# Altium PCB STM32f051C6T6_debugger.PcbDoc
Units mm, origin at the board's own origin, x right, y up, seen from the top; angles counter-clockwise.
Board outline 40 x 16 mm, 2 copper layers (Top Layer, Bottom Layer); 25 components, 45 nets, 113 pads, 0 vias.
Unrouted connection lines stored in the file: 63.
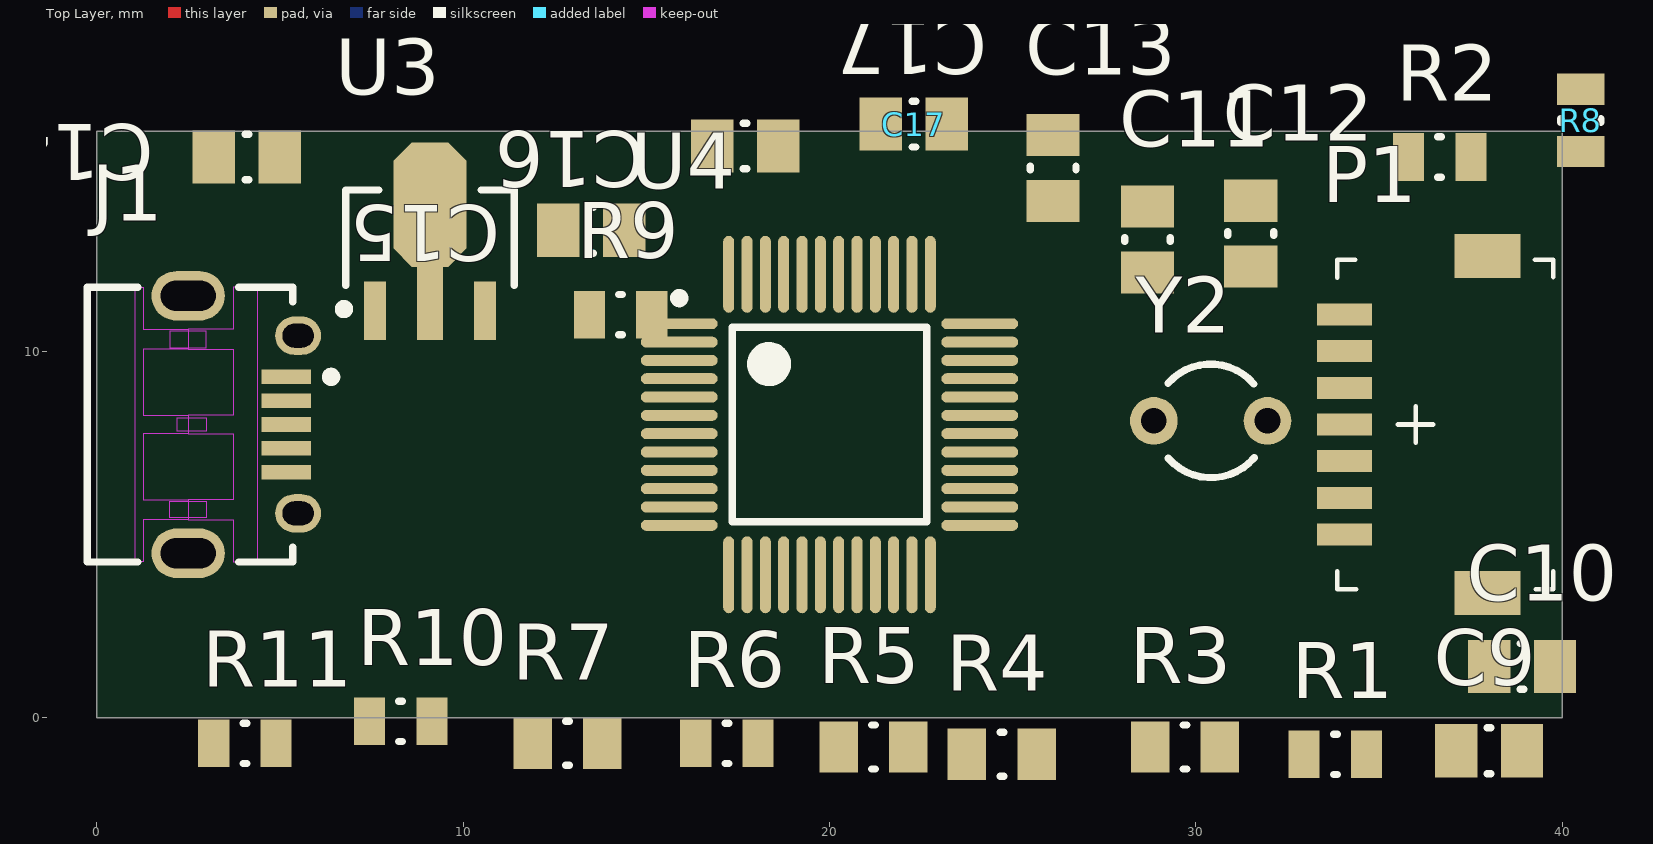
[diagram p0: Top Layer view]
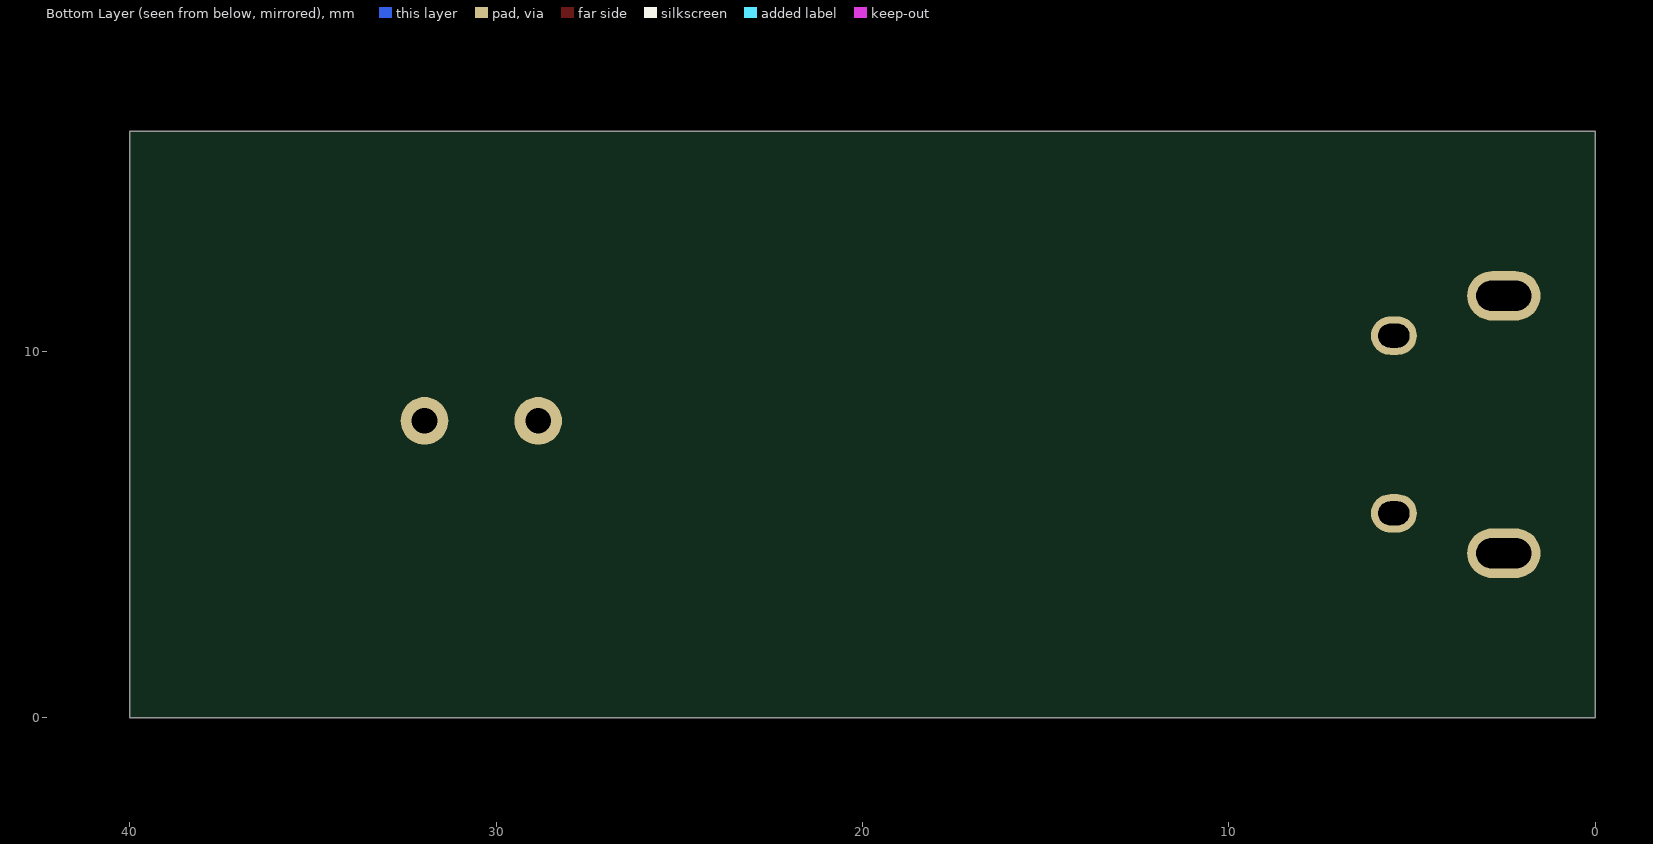
[diagram p1: Bottom Layer view, seen from below]

## Layer stack, top to bottom
Top Solder: solder mask 0.0102, Solder Resist, Dk 3.5
Top Layer: signal copper 0.0356
Dielectric 1: dielectric 0.32, FR-4, Dk 4.8
Bottom Layer: signal copper 0.0356
Bottom Solder: solder mask 0.0102, Solder Resist, Dk 3.5

## Board outline
0,0 40,0 40,16 0,16

## Design rules (kind name [scope] priority, off if disabled: settings)
Clearance [All] p1: gap=0.1 ignorepadtopadclearanceinfootprint=FALSE
MinimumSolderMaskSliver [All] p1: minsoldermaskwidth=0.05
PolygonConnect [All] p1: connectstyle=Relief reliefconductorwidth=0.254 reliefentries=4 polygonreliefangle="90 Angle" airgapwidth=0.254
RoomDefinition STM32f051C6T6_debugger [InComponentClass('STM32f051C6T6_debugger')] p1: confinementstyle=ConfineIn formatcopy=TRUE lockcomponents=FALSE outline -2,-2.2 42,-2.2 42,18 -2,18
RoutingVias [All] p1: holewidth=0.711 width=1.27 viastyle="Through Hole" minholewidth=0.711 minwidth=1.27 maxholewidth=0.711 maxwidth=1.27
SilkToSolderMaskClearance [IsPad] p1: minsilkscreentomaskgap=0.1 clearancetoexposedcopper=TRUE
SolderMaskExpansion [All] p1: expansion=0.102
Width [All] p1: maxlimit=0.254 minlimit=0.254 preferedwidth=0.254
28 further rules are at their usual default settings.

## Components (designator, comment, footprint, x,y, rotation, side; value= is the part's Value field where it differs from the comment)
C9 "CAP 100pF 50V 0805(2012)" CAPC0805(2012)145_N 38,-0.9 r0 top value=100pF
C10 "CAP 100pF 50V 0805(2012)" CAPC0805(2012)145_N 38.9,1.4 r0 top value=100pF
C11 "CAP 100pF 50V 0805(2012)" CAPC0805(2012)145_N 28.677,13.045 r90 top value=100pF
C12 "CAP 100pF 50V 0805(2012)" CAPC0805(2012)145_N 31.496,13.208 r90 top value=100pF
C13 "CAP 100pF 50V 0805(2012)" CAPC0805(2012)145_N 26.1,15 r90 top value=100pF
C14 "CAP 100pF 50V 0805(2012)" CAPC0805(2012)145_N 4.1,15.3 r180 top value=100pF
C15 "CAP 100pF 50V 0805(2012)" CAPC0805(2012)145_N 13.5,13.3 r180 top value=100pF
C16 "CAP 100pF 50V 0805(2012)" CAPC0805(2012)145_N 17.7,15.6 r180 top value=100pF
C17 "CAP 100pF 50V 0805(2012)" CAPC0805(2012)145_N 22.3,16.2 r180 top value=100pF
J1 "ZX62D-B-5P8" HIRO-ZX62D-B-5P8_V 4,8 r270 top
P1 "pico-clasp-7pins" "7 pins pico-clasp" 36,8 r90 top
R1 "1K 5% 0805(2012)" RESC0805(2012)_L 33.8,-1 r0 top value="10000.00 Ohm"
R2 "1K5 5% 0805(2012)" RESC0805(2012)_L 36.65,15.3 r0 top value="1500.00 Ohm"
R3 "Jumper 0805(2012)" RESC0805(2012)_N 29.7,-0.8 r0 top value="0.00 Ohm"
R4 "Jumper 0805(2012)" RESC0805(2012)_N 24.7,-1 r0 top value="0.00 Ohm"
R5 "4K7 5% 0805(2012)" RESC0805(2012)_N 21.2,-0.8 r0 top value="4700.00 Ohm"
R6 "100K 5% 0805(2012)" RESC0805(2012)_L 17.2,-0.7 r0 top value="100000.00 Ohm"
R7 "4K7 5% 0805(2012)" RESC0805(2012)_N 12.85,-0.7 r0 top value="4700.00 Ohm"
R8 "1K 5% 0805(2012)" RESC0805(2012)_L 40.5,16.3 r90 top value="10000.00 Ohm"
R9 "10K 5% 0805(2012)" RESC0805(2012)_L 14.3,11 r0 top value="10000.00 Ohm"
R10 "10K 5% 0805(2012)" RESC0805(2012)_L 8.3,-0.1 r180 top value="10000.00 Ohm"
R11 "1K 5% 0805(2012)" RESC0805(2012)_L 4.05,-0.7 r180 top value="10000.00 Ohm"
U3 "MCP1702T-3602E/MB" SOT-89-MB3_M 9.1,13.1 r90 top
U4 "STM32F051C6T6" STM-LQFP48_M 20,8 r0 top
Y2 "XTAL" R38 30.4,8.1 r90 top

## Footprints (in the part's own frame and the unit in brackets; to place one, negate y for a bottom-side part, rotate by r counter-clockwise, add the part's x,y. Pads: shape width x height; smd on the part's side, far side on the other; paste and mask are expansions set on the pad)
"7 pins pico-clasp" [mm]
  rect 0.6x1.5 smd: 1(-3.001,1.95) 2(-2.001,1.95) 3(-1.001,1.95) 4(-0.001,1.95) 5(1.002,1.95) 6(2.002,1.95) 7(3.002,1.95)
  rect 1.2x1.8 smd: ""(-4.601,-1.95) ""(4.602,-1.95)
  round 0.5 on Top Overlay: ""(-3.95,1.575)
  silkscreen extent -4.5,-3.75 4.5,2.15, body extent -4.5,-3.75 4.5,2.15, height 4.7
CAPC0805(2012)145_N [mm] "Chip Capacitor, Body 2.0x1.2mm, Height 1.45mm, IPC Medium Density"
  rect 1.15x1.45 smd: 1(-0.9,0) 2(0.9,0)
  silkscreen extent -0.05,-0.62 0.05,0.63, body extent -1.1,-0.72 1.1,0.73, height 1.45
HIRO-ZX62D-B-5P8_V [mm] "Micro-USB Connector, 9-Leads, Body 7.5x5.6mm, Pitch 0.65mm"
  rect 0.4x1.35 smd: 1(-1.3,1.175) 2(-0.65,1.175) 3(0,1.175) 4(0.65,1.175) 5(1.3,1.175)
  oval 1.05x1.25 hole 0.65 slot 0.85 at 90 deg: 6(-2.425,1.5) 7(2.425,1.5)
  oval 1.35x2 hole 0.825 slot 1.5 at 90 deg: 8(-3.512,-1.5) 9(3.512,-1.5)
  Top Layer keep-out region: 2.55,-2 2.1,-2 2.1,-1 2.55,-1
  Top Layer keep-out region: -2.55,-2 -2.1,-2 -2.1,-1 -2.55,-1
  Top Layer keep-out region: -0.18,-1.8 -0.18,-1 0.18,-1 0.18,-1.8
  Top Layer keep-out region: -3.75,-2.725 -2.6,-2.725 -2.6,-1.5 -2.05,-1.5 -2.05,-2.725 -0.25,-2.725 -0.25,-1.5 0.25,-1.5 0.25,-2.725 2.05,-2.725 2.05,-1.5 2.6,-1.5 2.6,-2.725 3.75,-2.725 3.75,-2.95 -3.75,-2.95
  Top Layer keep-out region: -2.6,-1.5 -2.05,-1.5 -2.05,-0.275 -0.25,-0.275 -0.25,-1.5 0.25,-1.5 0.25,-0.275 2.05,-0.275 2.05,-1.5 2.6,-1.5 2.6,-0.275 3.75,-0.275 3.75,0.395 -3.75,0.395 -3.75,-0.275 -2.6,-0.275
  silkscreen extent -3.75,-4.25 3.75,2.52, body extent -4.05,-4.15 4.05,1.65, height 2.75
R38 [mm] "Crystal, Thru-Hole; 2 Leads; Body 3.1 x 8.2 mm (Dia.xH)"
  round 1.3 hole 0.7: 1(0,1.55) 2(0,-1.55)
  silkscreen extent -1.55,-1.19 1.55,1.17
RESC0805(2012)_L [mm] "Chip Resistor, Body 2.0x1.3mm, IPC High Density"
  rect 0.85x1.3 smd: 1(-0.85,0) 2(0.85,0)
  silkscreen extent -0.05,-0.55 0.05,0.55, body extent -1.1,-0.67 1.1,0.68, height 0.7
RESC0805(2012)_N [mm] "Chip Resistor, Body 2.0x1.3mm, IPC Medium Density"
  rect 1.05x1.4 smd: 1(-0.95,0) 2(0.95,0)
  silkscreen extent -0.05,-0.6 0.05,0.6, body extent -1.1,-0.67 1.1,0.68, height 0.7
SOT-89-MB3_M [mm] "SOT89, 3-Leads, Body 4.5x2.4 mm, Pitch 1.5mm, Lead Span 4.1mm, IPC Low Density"
  rect 1.6x0.6 smd: 1(-2,1.5) 3(-2,-1.5)
  rect 2x0.7 smd: 2(-1.8,0)
  oct 3.4x2 smd: 2(0.9,0)
  silkscreen extent -2.07,-2.3 1.3,2.47, body extent -1.3,-2.3 1.3,2.3, height 1.6
STM-LQFP48_M [mm] "QFP, 48-Leads, Body 7x7mm, Pitch 0.5mm, IPC Low Density"
  oval 2.1x0.3 smd: 1(-4.1,2.75) 2(-4.1,2.25) 3(-4.1,1.75) 4(-4.1,1.25) 5(-4.1,0.75) 6(-4.1,0.25) 7(-4.1,-0.25) 8(-4.1,-0.75) 9(-4.1,-1.25) 10(-4.1,-1.75) 11(-4.1,-2.25) 12(-4.1,-2.75) 25(4.1,-2.75) 26(4.1,-2.25) 27(4.1,-1.75) 28(4.1,-1.25) 29(4.1,-0.75) 30(4.1,-0.25) 31(4.1,0.25) 32(4.1,0.75) 33(4.1,1.25) 34(4.1,1.75) 35(4.1,2.25) 36(4.1,2.75)
  oval 0.3x2.1 smd: 13(-2.75,-4.1) 14(-2.25,-4.1) 15(-1.75,-4.1) 16(-1.25,-4.1) 17(-0.75,-4.1) 18(-0.25,-4.1) 19(0.25,-4.1) 20(0.75,-4.1) 21(1.25,-4.1) 22(1.75,-4.1) 23(2.25,-4.1) 24(2.75,-4.1) 37(2.75,4.1) 38(2.25,4.1) 39(1.75,4.1) 40(1.25,4.1) 41(0.75,4.1) 42(0.25,4.1) 43(-0.25,4.1) 44(-0.75,4.1) 45(-1.25,4.1) 46(-1.75,4.1) 47(-2.25,4.1) 48(-2.75,4.1)
  silkscreen extent -4.22,-2.65 2.65,3.57, body extent -3.5,-3.5 3.5,3.5, height 1.6

## Part data
C9 C10 C11 C12 C13 C14 C15 C16 C17: library part CMP-1036-01961-1, "CAP 100pF 50V ±5% 0805 (2012 Metric) Thickness 1.45mm SMD", Case-EIA=0805, Case-Metric=2012, Rated Voltage="50 V", Tolerance=±5%, Max Thickness="1.45 mm", Technology=SMT
J1: library part CMP-0029-00002-1, "Right Angle Receptacle Connector, Micro USB, 30 V(AC), -30 to 85 degC, 5-Pin SMD, RoHS, Tape and Reel", Capacitance="1 uF", Case/Package=1206, Case Code (Metric)=3216, Max Operating Temperature=125degC, Min Operating Temperature=-55degC, Package Quantity=2000, Resistance="7.5 Ohm", Tolerance=10%, Voltage Rating="35 V", Case Code (Imperial)=1206, ComponentLink1Description="Manufacturer URL", ComponentLink1URL=https://www.hirose.com, ComponentLink2Description=Datasheet, ComponentLink2URL=https://www.hirose.com/product/en/download_file/key_name/ZX62D-B-5P8/category/Catalog/doc_file_id/31704/?file_category_id=5&item_id=02420034000&is_series=, ComponentLink3Description="Package Specification", ComponentLink3URL=https://www.hirose.com/product/en/download_file/key_name/ZX62D-B-5P8/category/Drawing%20(2D)/doc_file_id/36535/?file_category_id=6&item_id=02420034000&is_series=, DatasheetVersion=Aug-16, ESR="7.5 Ohm", Height="1.8 mm", Length="3.2 mm", Mount="Surface Mount", PackageDescription="USB Connector, 5 Position Surface Mount, Length 8 mm, Height 2.65 mm", PackageReference=ZX62D-B-5P8, Packaging="Tape and Reel", Pins=2, Radiation Hardening=No, REACH SVHC="No SVHC", RoHSCompliant=True, Voltage Rating (DC)="35 V", Weight="0.000571 oz", Width="1.6 mm"
P1: library part pico-clasp-7, "7 pins pico clasp"
R1 R8 R9 R10 R11: library part CMP-1013-00098-1, "10K 0.125W 5% 0805 (2012 Metric)  SMD", Case-EIA=0805, Case-Metric=2012, Power="0.125 W", Tolerance="5 %", Technology=SMT
R2: library part CMP-1013-00078-1, "1K5 0.125W 5% 0805 (2012 Metric)  SMD", Case-EIA=0805, Case-Metric=2012, Power="0.125 W", Tolerance="5 %", Technology=SMT
R3 R4: library part CMP-1013-00001-1, "Jumper 0805 (2012 Metric)", Case-EIA=0805, Case-Metric=2012, Power=None, Technology=SMT, Tolerance=None
R5 R7: library part CMP-1013-00090-1, "4K7 0.125W 5% 0805 (2012 Metric)  SMD", Case-EIA=0805, Case-Metric=2012, Power="0.125 W", Tolerance="5 %", Technology=SMT
R6: library part CMP-1013-00122-1, "100K 0.125W 5% 0805 (2012 Metric)  SMD", Case-EIA=0805, Case-Metric=2012, Power="0.125 W", Tolerance="5 %", Technology=SMT
U3: library part CMP-0136-00851-1, "250 mA Low Quiescent Current LDO Regulator, 3-Pin SOT-89, Extended Temperature, Tape and Reel", Code_IPC=SOT89, DatasheetVersion="revD, Jun-2009", PackageDescription="3-Lead Plastic Small Outline Transistor Header (MB) [SOT-89]", PackageReference=SOT-89-MB3, PackageVersion="revBB, Aug-2009"
U4: library part CMP-0304-00011-3, "ARM Cortex-M0 32-bit MCU, 32 KB Flash, 4 KB Internal RAM, 39 I/Os, 48-pin LQFP, -40 to 85 degC, Tray", I/Os (High Current)=39, Operating Frequency(F) (Processor speed) (MHz)=48, Supply Voltage(Vcc) min (V)=2, ComponentLink1Description="Manufacturer URL", ComponentLink1URL=http://www.st.com/web/en/home.html, ComponentLink2Description=Datasheet, ComponentLink2URL=http://www.st.com/st-web-ui/static/active/en/resource/technical/document/datasheet/DM00039193.pdf, ComponentLink3Description="Package Specification", ComponentLink3URL=http://www.st.com/st-web-ui/static/active/en/resource/technical/document/datasheet/DM00058181.pdf, Core="ARM Cortex-M0", DatasheetVersion="Rev. 3", FLASH Size (Prog) (kB)=32, Internal RAM Size (kB)=4, Mounting Technology="Surface Mount", PackageDescription="48-Pin Low Profile Quad Flat Package, 7 x 7 mm Body, 0.5 mm Pitch", PackageReference=LQFP48, PackageVersion="Rev. 6, 06/2013", Packing=Tray, PartNumber=STM32F051C6T6
Y2: "Crystal Oscillator", LatestRevisionDate=17-Jul-2002, LatestRevisionNote="Re-released for DXP Platform.", PackageDescription="Crystal, Thru-Hole; 2 Leads; Body 3.1 x 8.2 mm (Dia.xH)", PackageReference=R38, Published=8-Jun-2000, Publisher="Altium Limited"

## Nets (pads, with @x,y where several pads share a name; then routed paths per layer and width w, separated by ;. In a path a pad name is that pad's centre, name@x,y a point inside that pad or via, vN(x,y) a via of type N, cw(c..) or ccw(c..) an arc to the next point about the centre after c; other vN are vias at no path point)
3V3: C10.2 C14.2 C15.2 C16.2 C17.2 P1.2 R2.2 R5.2 R11.2 U3.3 U4.1 U4.9 U4.24 U4.48
5V: C9.2 J1.1 P1.1 U3.2
GND: C9.1 C10.1 C11.1 C12.1 C13.1 C14.1 C15.1 C16.1 C17.1 J1.5 J1.6 J1.7 J1.8 J1.9 P1.3 R6.1 R7.1 R8.2 R9.1 R10.1 U3.1 U4.8 U4.23 U4.47
LED_STLINK: U4.30
NetJ1_2: J1.2 R3.1
NetJ1_3: J1.3 R2.1 R4.1
NetJ1_4: J1.4 R6.2
NetR8_1: R8.1 U4.44
NRST: C13.2 R11.1 U4.7
OSC_IN: C11.2 U4.5 Y2.1
OSC_OUT: C12.2 U4.6 Y2.2
PA0: R5.1 R7.2 U4.10
PA1: U4.11
PA2: U4.12
PA3: U4.13
PA4: U4.14
PA5: U4.15
PA6: U4.16
PA7: U4.17
PA8: U4.29
PA10: U4.31
PA15: U4.38
PB0: U4.18
PB1: U4.19
PB2: U4.20
PB3: U4.39
PB4: U4.40
PB5: U4.41
PB6: U4.42
PB7: U4.43
PB8: U4.45
PB9: U4.46
PB10: U4.21
PB11: U4.22
PB15: U4.28
PC13: R9.2 U4.2
PC14: R10.2 U4.3
PC15: U4.4
PF6: U4.35
PF7: U4.36
SWD_CLK: P1.5 P1.7 U4.26 U4.37
SWD_IO: P1.4 P1.6 R1.1 U4.27 U4.34
T_SWDIO_IN: R1.2 U4.25
USB_DM: R3.2 U4.32
USB_DP: R4.2 U4.33
pads on no net: P1.

## Silkscreen, mask and mechanical layers (free items; w line width, h text height)
Mechanical 1:
  lines w0.25: -2,-2 -2,18 42,18 42,-2 -2,-2 ; 0,0 0,16 40,16 40,0 0,0

## Text inside footprints (layer, text, board x,y; h text height)
J1: Mechanical 1 "Board Edge" at 0.595,9.567 h0.3 r270